# EAGLE board dc_motor (EAGLE 9.7.0)

Size 177.38 x 102.44 mm. Coordinates in mm from the lower left corner, seen from the top.
Outline: 0,0 177.38,0 177.38,102.44 0,102.44 0,0
Copper layers (1*16): Top 0.035mm / dielectric 1.5mm / Bottom 0.035mm
Design rules "default": minimum track width 6mil, minimum drill 0.35mm, track to track 6mil, track to pad 6mil, pad to pad 6mil, via to via 6mil, smd to smd 6mil, copper to edge 40mil, drill to drill 6mil, minimum pad ring 10mil, minimum via ring 8mil, stop-mask expansion 4mil, vias tented up to drill 0mil, thermal gap 10mil

## Footprints (pad centres in the part's own frame; a part is rotated, then mirrored left to right if it is on the bottom)
BATTERY-GENERIC = drill 1.118 pad 3.15 octagon: + 2.54,0; - -2.54,0
MOTOR = drill 1.118 pad 3.15 octagon: + 2.54,0; - -2.54,0
ARDUINO-UNO-R3-SHIELD = drill 1.016 pad 1.88: 3.3V 24.13,-2.54; 5V 24.13,0; A0 24.13,12.7; A1 24.13,15.24; A2 24.13,17.78; A3 24.13,20.32; A4 24.13,22.86; A5 24.13,25.4; AREF -24.13,-13.97; D2 -24.13,20.32; D3 -24.13,17.78; D4 -24.13,15.24; D5 -24.13,12.7; D6 -24.13,10.16; D7 -24.13,7.62; D8 -24.13,3.81; D9 -24.13,1.27; D10 -24.13,-1.27; D11 -24.13,-3.81; D12 -24.13,-6.35; D13 -24.13,-8.89; GND@0 24.13,2.54; GND@1 24.13,5.08; GND@2 -24.13,-11.43; IOREF 24.13,-7.62; NC 24.13,-10.16; RES 24.13,-5.08; RX -24.13,25.4; SCL -24.13,-19.05; SDA -24.13,-16.51; TX -24.13,22.86; VIN 24.13,7.62
DIP762W53P254L1969H508Q16B = drill 0.743 pad 1.343: 1 -3.81,8.89; 2 -3.81,6.35; 3 -3.81,3.81; 4 -3.81,1.27; 5 -3.81,-1.27; 6 -3.81,-3.81; 7 -3.81,-6.35; 8 -3.81,-8.89; 9 3.81,-8.89; 10 3.81,-6.35; 11 3.81,-3.81; 12 3.81,-1.27; 13 3.81,1.27; 14 3.81,3.81; 15 3.81,6.35; 16 3.81,8.89

## Placement (x,y rotation side)
BATBATTERY1  9V  [BATTERY-GENERIC]  8.26,94.18 90 top
MMOTOR  MOTOR_HDR  [MOTOR]  169.12,43.3 270 top
UARDUINO  ARDUINO-UNO-R3-SHIELD  [ARDUINO-UNO-R3-SHIELD]  106.14,29.84 270 top
UH-BRIDGE_MOTOR  L293E  [DIP762W53P254L1969H508Q16B]  147.64,74.43 90 top

## Library data of the parts
BATBATTERY1 MMOTOR UARDUINO UH-BRIDGE_MOTOR = Tinkercad

## Nets
BATBATTERY1+: BATBATTERY1.+ UH-BRIDGE_MOTOR.8
BATBATTERY1-: BATBATTERY1.- UARDUINO.GND@0 UARDUINO.GND@1 UARDUINO.GND@2 UH-BRIDGE_MOTOR.4 UH-BRIDGE_MOTOR.5
MMOTOR_+: MMOTOR.+ UH-BRIDGE_MOTOR.6
MMOTOR_-: MMOTOR.- UH-BRIDGE_MOTOR.3
UARDUINO_5V: UARDUINO.5V UH-BRIDGE_MOTOR.1 UH-BRIDGE_MOTOR.16
UARDUINO_D12: UARDUINO.D12 UH-BRIDGE_MOTOR.7
UARDUINO_D13: UARDUINO.D13 UH-BRIDGE_MOTOR.2

## Tracks (layer width: path | path; a pad name or v marks a point on that pad's centre or on a via)
BATBATTERY1+  (1 unrouted)
BATBATTERY1-  (5 unrouted)
MMOTOR_+  (1 unrouted)
MMOTOR_-  (1 unrouted)
UARDUINO_5V  (2 unrouted)
UARDUINO_D12  (1 unrouted)
UARDUINO_D13  (1 unrouted)